# Altium PCB LightingDriver.PcbDoc (part 2 of 2)
Units mm, origin at the board's own origin, x right, y up, seen from the top; angles counter-clockwise.
Board outline 100 x 95 mm, 2 copper layers (Top Layer, Bottom Layer), stack 1.621 mm thick; 95 components, 49 nets, 284 pads, 147 vias.
Unrouted connection lines stored in the file: 4.
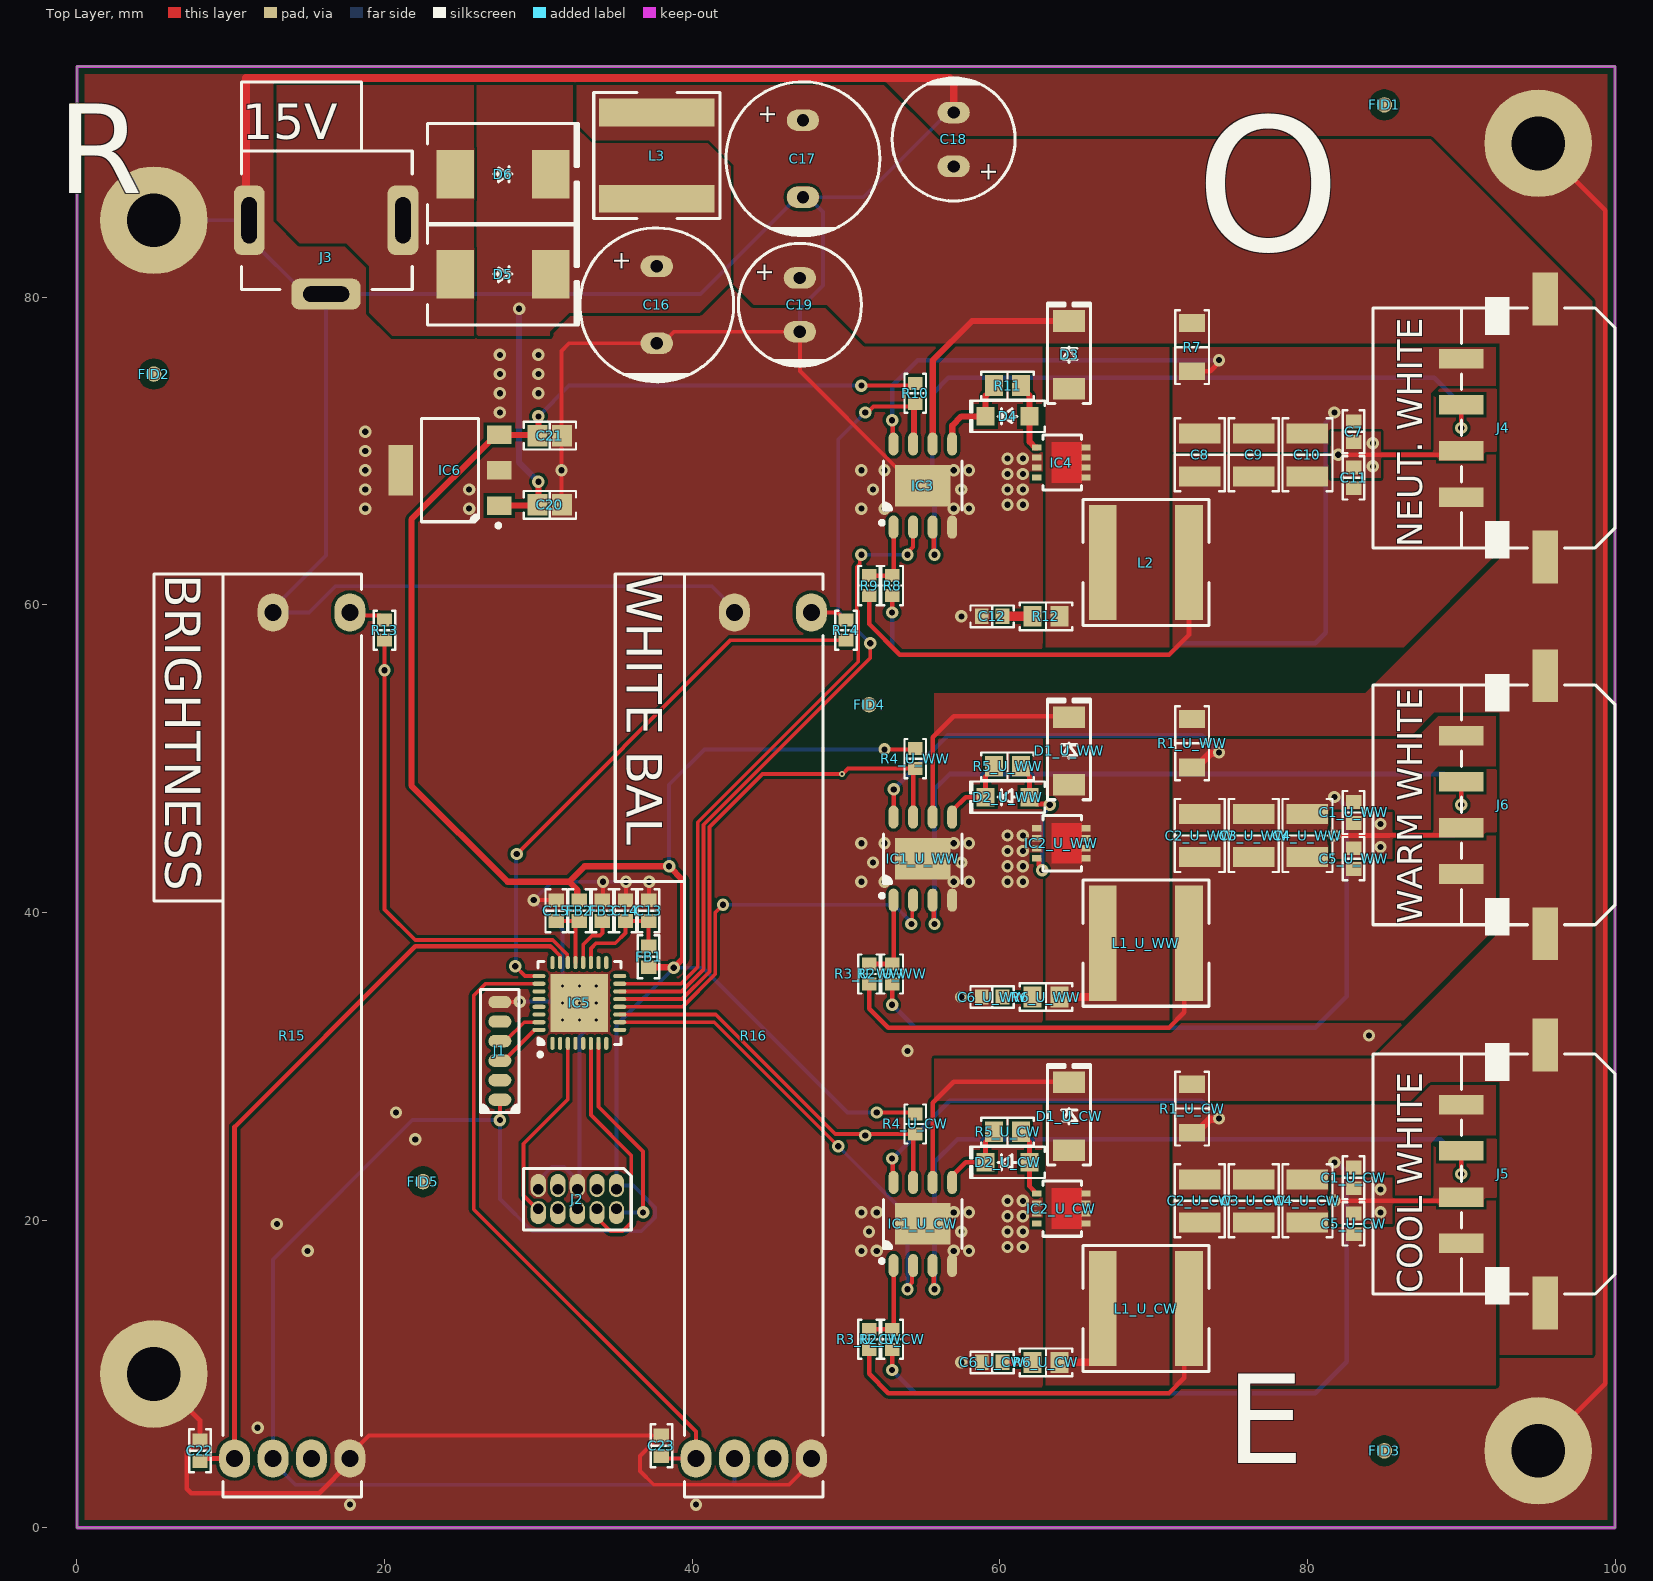
[diagram p0: Top Layer view]

## Via types
v1: diameter 0.8, hole 0.4, Top Layer to Bottom Layer, tented both sides, 137 vias
v2: diameter 0.5, hole 0.2, Top Layer to Bottom Layer, tented both sides, 9 vias
v3: diameter 0.4, hole 0.2, Top Layer to Bottom Layer, tented both sides, 1 vias

## Nets (pads, with @x,y where several pads share a name; then routed paths per layer and width w, separated by ;. In a path a pad name is that pad's centre, name@x,y a point inside that pad or via, vN(x,y) a via of type N, cw(c..) or ccw(c..) an arc to the next point about the centre after c; other vN are vias at no path point) (continued)
BRIGHTNESS: (continued)
  Bottom Layer w0.3: TP3.1 8.09,4.513 10.237,4.513 R15.2
BRIGHTNESS_LED: IC5.22 R13.2 TP4.1 | length 31.1
  Top Layer w0.25: R13.2 20,40.2 22,38.2 30.933,38.2 31.875,37.258 31.875,37.075 31.915,37.035 IC5.22
  other v1: 20,55.75
DIM: IC3.2 IC5.15 TP1.1 | length 41.8
  Top Layer w0.25: IC5.15 39.265,35.365 40.36,36.46 40.36,45.86 50.8,56.3 50.8,59.56 50.7,59.66 50.7,62.46 50.895,62.654 50.895,63.145 v1(51,63.25) ; v1(54,63.25) 54,63.399 54.365,63.764 IC3.2
  Bottom Layer w0.25: v1(51,63.25) v1(54,63.25)
DIM_U_CW: IC1_U_CW.2 IC5.10 TP5.1 | length 30.4
  Top Layer w0.25: IC5.10 41.435,32.865 v1(49.5,24.8) ; v1(54,15.5) 54,15.649 54.288,15.937 54.288,16.973 IC1_U_CW.2
  Bottom Layer w0.25: v1(49.5,24.8) 54,20.3 v1(54,15.5)
DIM_U_WW: IC1_U_WW.2 IC5.12 TP9.1 | length 26.2
  Top Layer w0.25: IC5.12 39.377,33.865 41.5,35.988 41.5,40 v1(42,40.5) ; v1(54.25,39.25) 54.307,39.307 54.307,40.743 IC1_U_WW.2
  Bottom Layer w0.25: v1(42,40.5) 53.1,40.5 54.25,39.35 v1(54.25,39.25)
DRV_HP: D4.2 IC3.5 R11.1 | length 5.8
  Top Layer w0.4: IC3.5 56.905,71.655 57.5,72.25 D4.2 59.07,73.595 59.625,74.15 R11.1
DRV_LP_U_CW: D2_U_CW.2 IC1_U_CW.5 R5_U_CW.1 | length 5.2
  Top Layer w0.3: IC1_U_CW.5 56.905,22.875 57.78,23.75 D2_U_CW.2 59.07,25.095 59.625,25.65 R5_U_CW.1
DRV_LP_U_WW: D2_U_WW.2 IC1_U_WW.5 R5_U_WW.1 | length 5.2
  Top Layer w0.3: IC1_U_WW.5 56.905,46.625 57.78,47.5 D2_U_WW.2 59.07,48.845 59.625,49.4 R5_U_WW.1
ERROR_CW: IC1_U_CW.7 IC5.11 R4_U_CW.1 TP8.1 | length 25.6
  Top Layer w0.25: IC5.11 41.535,33.365 49.3,25.6 R4_U_CW.1 R4_U_CW.1@54.365,25.465
  Top Layer w0.3: IC1_U_CW.7 R4_U_CW.1@54.365,25.465
  other v1: 51.25,25.5
ERROR_NW: IC3.7 IC5.14 R10.1 TP2.1 | length 54.4
  Top Layer w0.25: IC5.14 39.302,34.865 40.74,36.303 40.74,45.703 51.579,56.542 v1(51.579,57.5) ; v1(51.25,72.5) 51.399,72.5 51.78,72.881 54.281,72.881 54.413,73.013 R10.1
  Top Layer w0.4: IC3.7 54.413,70.498 R10.1@54.413,73.013
  Bottom Layer w0.25: v1(51.25,72.5) 49.5,70.75 49.5,59.579 v1(51.579,57.5)
ERROR_WW: IC1_U_WW.7 IC5.13 R4_U_WW.1 TP10.1 | length 34.1
  Top Layer w0.25: IC5.13 39.34,34.365 41.12,36.145 41.12,45.545 44.575,49 v3(49.75,49) 49.791,49 50.141,49.35 R4_U_WW.1
  Top Layer w0.3: IC1_U_WW.7 54.365,49.215 R4_U_WW.1
GATE_HP: D4.1 IC4.G R11.2 | length 4.5
  Top Layer w0.4: R11.2 61.375,74.15 61.93,73.595 D4.1 61.93,70.595 62.3,70.225 62.4,70.225
GATE_LP_U_CW: D2_U_CW.1 IC2_U_CW.G R5_U_CW.2 | length 4.5
  Top Layer w0.3: R5_U_CW.2 61.375,25.65 61.93,25.095 D2_U_CW.1 61.93,22.195 62.25,21.875 62.25,21.775 62.3,21.725 62.4,21.725
GATE_LP_U_WW: D2_U_WW.1 IC2_U_WW.G R5_U_WW.2 | length 9.2
  Top Layer w0.3: R5_U_WW.2 61.375,49.4 61.93,48.845 D2_U_WW.1 62.38,47.05 63.2,47.05 v1(63.25,47) ; IC2_U_WW.G 62.5,43.525 62.55,43.475 62.55,43.085 62.75,42.885 v1(62.75,42.75)
  Bottom Layer w0.3: v1(62.75,42.75) 62.75,46.365 63.25,46.865 v1(63.25,47)
GND: C1_U_CW.1 C1_U_WW.1 C5_U_CW.1 C5_U_WW.1 C6_U_CW.1 C6_U_WW.1 C7.1 C11.1 C12.1 C13.1 C14.1 C15.1 C16.2 C17.2 C18.2 C19.2 C20.1 C21.1 C22.1 C23.1 FB3.1 IC1_U_CW.4 IC1_U_CW.9 IC1_U_WW.4 IC1_U_WW.9 IC2_U_CW.S IC2_U_WW.S IC3.4 IC3.9 IC4.S IC5.33 IC6.2 IC6.4 J1.6 J2.5 J2.9 J3.2 J3.3 J4.3 J5.3 J6.3 pad.M1 pad.M2 pad.M3 pad.M4 R15.3 R15.E R16.3 R16.E | length 430.4
  Top Layer w0.25: R15.E 17.75,4.75 19,6 C23.1@37.95,6 ; J1.6 27.513,34.188 28.788,34.188 v1(28.8,34.2) ; v1(29.7,40.8) 31.155,40.8 C15.1 ; C20.1@31.5,66.5 31.5,76.5 32,77 C16.2 38.07,77 38.82,77.75 C19.2 47,75.201 53.226,68.975 53.775,68.975 IC3.9 ; FB3.1 34.2,40.825 v1(34.2,42) ; C14.1 35.7,40.825 v1(35.7,42) ; C13.1 37.2,40.825 v1(37.2,42) ; C23.1 C23.1@37.95,6 ; R16.E 47.75,4.25 46.295,2.795 37.505,2.795 36.604,3.696 36.604,4.663 37.365,5.425 37.375,5.425 C23.1@37.95,6
  Top Layer w0.3: pad.M1 8,7 C22.1 7.95,5.675 7.407,5.132 7.362,5.132 7.15,4.92 7.15,2.526 7.426,2.25 15.75,2.25 17.75,4.25 R15.E ; v1(81.75,21.25) 89.75,21.25 J5.3 ; v1(81.75,45) 85.328,45 85.343,45.015 89.515,45.015 J6.3 ; v1(82,69.75) 89.75,69.75 J4.3 ; pad.M4 99.35,9.35 99.35,85.65 pad.M3
  Top Layer w0.5: J3.2 11,85 11,94.25 56.707,94.25 57,93.957 C18.2
  Bottom Layer w0.25: pad.M2 J3.2 11.2,83.85 14.85,80.2 J3.3 ; v1(28.8,34.2) 31.412,34.2 31.497,34.115 v2(31.565,34.115) ; J2.9 30,22.581 30.874,23.455 31.666,23.455 32.54,22.581 J2.5 32.679,22.139 32.679,31.929 v2(33.765,33.015) ; v2(31.565,35.215) 31.565,38.935 v1(29.7,40.8) 30.9,42 v1(34.2,42) v1(35.7,42) v1(37.2,42) ; R16.3 42.75,59.75 41.295,61.205 16.808,61.205 15.103,59.5 R15.3 12.75,59.75 16.2,63.2 J3.3 ; C19.2 47,79.252 48.505,80.757 48.505,85.545 C17.2@47.55,86.5 ; C18.2 56.65,92 51.15,86.5 C17.2@47.55,86.5 ; J3.3 40.55,80.2 46.85,86.5 C17.2 C17.2@47.55,86.5
  other v1: 17.75,1.5 40.25,1.5 11.75,6.5 57.5,10.75 15,18 51,18 52,18 57,18 58,18 60.5,18.25 61.5,18.25 51.5,19.25 57.5,19.25 60.5,19.25 61.5,19.25 13,19.75 60.5,20.25 61.5,20.25 51,20.5 52,20.5 57,20.5 58,20.5 84.75,20.5 60.5,21.25 61.5,21.25 84.75,22 22,25.25 20.75,27 54,31 84,32 57.5,34.5 51,42 52.5,42 57,42 58,42 60.5,42 61.5,42 60.5,43 61.5,43 51.75,43.25 57.5,43.25 60.5,44 61.5,44 84.75,44.25 51,44.5 52.5,44.5 57,44.5 58,44.5 60.5,45 61.5,45 84.75,45.75 57.5,59.25 18.75,66.25 25.5,66.25 51,66.25 52.5,66.25 57,66.25 58,66.25 60.5,66.5 61.5,66.5 18.75,67.5 25.5,67.5 51.75,67.5 57.5,67.5 60.5,67.5 61.5,67.5 60.5,68.5 61.5,68.5 18.75,68.75 31.5,68.75 51,68.75 52.5,68.75 57,68.75 58,68.75 84.25,69 60.5,69.5 61.5,69.5 18.75,70 84.25,70.5 18.75,71.25 27.5,72.5 27.5,73.75 30,73.75 27.5,75 30,75 27.5,76.25 30,76.25
  other v2: 31.565,33.015 32.665,33.015 32.665,34.115 33.765,34.115 32.665,35.215 33.765,35.215
LED_N: C8.1 C9.1 C10.1 C11.2 J4.4 L2.2 R9.1 | length 28.7
  Top Layer w0.3: R9.1 51.5,58.75 53.5,56.75 71,56.75 72.3,58.05 L2.2
LED_P: C7.2 C8.2 C9.2 C10.2 IC3.8 J4.1 R7.1 R8.2 | length 74.8
  Top Layer w0.3: v1(53,59.5) R8.2 ; v1(53,72) 53.047,71.953 53.047,70.498 IC3.8 ; R7.1 73.675,75.175 73.8,75.3 73.8,75.319 74.25,75.769 v1(74.25,75.904)
  Bottom Layer w0.3: v1(53,59.5) 53,57.25 53.5,56.75 71,56.75 71.75,57.5 80.5,57.5 81.196,58.196 81.196,71.852 81.75,72.406 v1(81.75,72.5) ; v1(53,72) 53,74.25 54.654,75.904 v1(74.25,75.904)
LED_U_CW_N: C2_U_CW.1 C3_U_CW.1 C4_U_CW.1 C5_U_CW.2 J5.4 L1_U_CW.2 R3_U_CW.1 | length 27.7
  Top Layer w0.3: R3_U_CW.1 51.5,10 52.75,8.75 71,8.75 72,9.75 72,13.95 L1_U_CW.2
LED_U_CW_P: C1_U_CW.2 C2_U_CW.2 C3_U_CW.2 C4_U_CW.2 IC1_U_CW.8 J5.1 R1_U_CW.1 R2_U_CW.2 | length 72.8
  Top Layer w0.3: v1(53,10.25) R2_U_CW.2 ; v1(53,24) 53.047,23.953 53.047,22.497 IC1_U_CW.8
  Top Layer w0.5: R1_U_CW.1 72.775,25.675 73.647,26.547 74.193,26.547 v1(74.25,26.604)
  Bottom Layer w0.3: v1(53,10.25) 54.5,8.75 80.5,8.75 82.554,10.804 82.554,23.14 82.342,23.352 82.283,23.352 81.885,23.75 v1(81.75,23.75) ; v1(53,24) 56.75,27.75 73.104,27.75 v1(74.25,26.604)
LED_U_WW_N: C2_U_WW.1 C3_U_WW.1 C4_U_WW.1 C5_U_WW.2 J6.4 L1_U_WW.2 R3_U_WW.1 | length 27.7
  Top Layer w0.3: R3_U_WW.1 51.5,33.75 52.75,32.5 71,32.5 72,33.5 72,37.7 L1_U_WW.2
LED_U_WW_P: C1_U_WW.2 C2_U_WW.2 C3_U_WW.2 C4_U_WW.2 IC1_U_WW.8 J6.1 R1_U_WW.1 R2_U_WW.2 | length 72.8
  Top Layer w0.3: v1(53,34) R2_U_WW.2 ; IC1_U_WW.8 53.097,46.203 53.097,47.997 v1(53.1,48)
  Top Layer w0.5: R1_U_WW.1 72.775,49.425 73.697,50.347 74.193,50.347 v1(74.25,50.404)
  Bottom Layer w0.3: v1(53,34) 54.5,32.5 80.5,32.5 82.554,34.554 82.554,46.89 82.342,47.102 82.283,47.102 81.885,47.5 v1(81.75,47.5) ; v1(53.1,48) 56.6,51.5 73.154,51.5 v1(74.25,50.404)
NetR13_1: R13.1 R15.B | length 2.5
  Top Layer w0.25: R15.B 17.95,59.3 19.7,59.3 R13.1
NetR14_1: R14.1 R16.B | length 2.5
  Top Layer w0.25: R16.B 49.45,59.5 49.95,59 R14.1
NTC: IC3.3 J4.2 | length 50.9
  Top Layer w0.3: IC3.3 55.692,64.993 55.692,63.308 v1(55.75,63.25) ; v1(90,71.5) J4.2
  Bottom Layer w0.3: v1(55.75,63.25) 55.75,68.468 55.6,68.618 55.6,73.7 56.65,74.75 88.25,74.75 90,73 v1(90,71.5)
NTC_U_CW: IC1_U_CW.3 J5.2 | length 47.7
  Top Layer w0.3: IC1_U_CW.3 55.692,16.993 55.692,15.558 v1(55.75,15.5) ; v1(90,23) J5.2
  Bottom Layer w0.3: v1(55.75,15.5) 55.75,23.75 57.25,25.25 88.65,25.25 90,23.9 v1(90,23)
NTC_U_WW: IC1_U_WW.3 J6.2 | length 47.9
  Top Layer w0.3: IC1_U_WW.3 55.692,40.743 55.692,39.308 v1(55.75,39.25) ; v1(90,47) J6.2
  Bottom Layer w0.3: v1(55.75,39.25) 55.75,48 56.75,49 88.9,49 90,47.9 v1(90,47)
OSP_HP: IC3.1 R8.1 R9.2 | length 4.7
  Top Layer w0.3: R9.2 R8.1 53.095,61.995 IC3.1
OSP_LP_U_CW: IC1_U_CW.1 R2_U_CW.1 R3_U_CW.2 | length 5.7
  Top Layer w0.3: R3_U_CW.2 R2_U_CW.1 53.095,12.995 IC1_U_CW.1
OSP_LP_U_WW: IC1_U_WW.1 R2_U_WW.1 R3_U_WW.2 | length 5.7
  Top Layer w0.3: R3_U_WW.2 R2_U_WW.1 53.095,36.745 IC1_U_WW.1
RESET: IC5.3 J2.10 | length 12.4
  Top Layer w0.25: J2.10 29.919,20.73 29.045,21.604 29.045,24.963 31.915,27.833 IC5.3
SNUB_HP: C12.2 R12.1 | length 2
  Top Layer w0.6: C12.2 R12.1
SNUB_LP_U_CW: C6_U_CW.2 R6_U_CW.1 | length 1.9
  Top Layer w0.5: C6_U_CW.2 R6_U_CW.1
SNUB_LP_U_WW: C6_U_WW.2 R6_U_WW.1 | length 1.9
  Top Layer w0.5: C6_U_WW.2 R6_U_WW.1
SW_HP: D3.1 IC4.D L2.1 R12.2
SW_LP_U_CW: D1_U_CW.1 IC2_U_CW.D L1_U_CW.1 R6_U_CW.2 | length 5.9
  Top Layer w0.5: R6_U_CW.2 66.05,10.75 66.7,11.4 L1_U_CW.1
SW_LP_U_WW: D1_U_WW.1 IC2_U_WW.D L1_U_WW.1 R6_U_WW.2 | length 5.9
  Top Layer w0.5: R6_U_WW.2 66.05,34.5 66.7,35.15 L1_U_WW.1
SWCLK: IC5.6 J2.4 | length 16.1
  Top Layer w0.25: IC5.6 33.415,26.823 36.035,24.203 36.035,19.834 35.476,19.275 34.684,19.275 33.81,20.149 J2.4
SWDIO: IC5.7 J2.2 | length 14
  Top Layer w0.25: IC5.7 33.915,27.369 36.814,24.47 v1(36.814,20.5)
  Bottom Layer w0.25: J2.2 35.31,20.5 v1(36.814,20.5)
UART_RX: IC5.31 J1.4 | length 3
  Top Layer w0.25: J1.4 27.85,31.635 29.08,32.865 IC5.31
UART_TX: IC5.32 J1.3 | length 3.4
  Top Layer w0.25: J1.3 27.755,30.365 29.755,32.365 IC5.32
VIN: C16.1 C20.2 D5.2 D6.2 IC6.1 L3.1 | length 15.8
  Top Layer w0.4: IC6.1 29.9,66.45 C20.2 30,66.55 v1(30,68)
  Bottom Layer w0.4: v1(28.75,79.25) 28.75,69.25 v1(30,68)
VJACK: D5.1 D6.1 J3.1
VREFN: FB3.2 IC5.20 | length 3.5
  Top Layer w0.25: IC5.20 32.915,37.915 33.5,38.5 34,38.5 34.165,38.665 FB3.2
VREFP: C15.2 FB2.2 IC5.21 | length 4.3
  Top Layer w0.25: C15.2 FB2.2 32.415,39.19 IC5.21
WHITEBAL: C23.2 IC5.26 R16.2 TP7.1 | length 45.2
  Top Layer w0.25: IC5.26 26.565,35.365 25.8,34.6 25.8,20.7 40.25,6.25 R16.2 38.15,4.5 C23.2
  Bottom Layer w0.25: TP7.1 R16.2
WHITEBAL_LED: IC5.25 R14.2 TP6.1 | length 36.3
  Top Layer w0.25: v1(28.5,36.5) 29.135,35.865 IC5.25 ; v1(28.6,43.8) 42.5,57.7 R14.2
  Bottom Layer w0.25: v1(28.5,36.5) 28.55,36.55 28.55,43.75 v1(28.6,43.8)
pads on no net: FID1.F FID2.F FID3.F FID4.F FID5.F IC5.1 IC5.2 IC5.4 IC5.5 IC5.8 IC5.9 IC5.16 IC5.17 IC5.18 IC5.24 IC5.27 IC5.28 IC5.29 IC5.30 J1.2 J1.5 J2.3 J2.6 J2.7 J2.8 R15.L R16.L

## Polygon pours and split planes (outlines as drawn)
GND on Top Layer "GND_L01_P047" (solid, remove dead copper, pour order 47): 0,0 0,95 100,95 100,0
LED_N on Top Layer "gnd" (solid, remove dead copper, pour order 25): 71.25,69.75 92.25,69.75 92.25,63.25 86.25,57.25 71.25,57.25
15V on Top Layer "gnd" (solid, remove dead copper, pour order 44): 55.75,51.5 86.75,51.5 88.25,53 93.25,53 93.25,63 92.5,63 83.75,54.25 55.75,54.25
LED_P on Top Layer "gnd" (solid, remove dead copper, pour order 26): 71.25,69.75 71.25,76.75 92.25,76.75 92.25,74.25 88.5,74.25 88,73.75 88,69.75
15V on Top Layer "15V_L01_P043" (solid, remove dead copper, pour order 43): 98.5,78.75 92.5,78.75 92.5,11.25 98.5,11.25
15V on Top Layer "15V_L01_P042" (solid, remove dead copper, pour order 42): 32.5,95 51.25,95 56,90.25 88,90.25 98.5,79.75 98.5,77 51.25,77 48.75,79.5 44,79.5 42.5,81 42.5,88.5 41,90 32.5,90
VJACK on Top Layer "VJACK_L01_P041" (solid, remove dead copper, pour order 41): 26,77.5 20.5,77.5 19,79 19,82 17.5,83.5 14.5,83.5 13,85 13,95 26,95
VIN on Top Layer "Top Layer-VIN" (solid, remove dead copper, pour order 40): 26,95 32.25,95 32.25,91.25 33.5,90 41,90 42.5,88.5 42.5,81 40.5,79 32,79 30.75,77.75 30.75,77.5 26,77.5
GND on Top Layer "gnd" (solid, remove dead copper, pour order 39): 50.5,45 57.5,45 57.5,46.75 63,46.75 63,33 56.25,33 56.25,41.25 50.5,41.25
LED_U_WW_P on Top Layer "gnd" (solid, remove dead copper, pour order 36): 71.25,45.25 71.25,51.25 87,51.25 88.5,52.75 92.25,52.75 92.25,49.5 88.5,49.5 88,49 88,45.25
LED_U_WW_N on Top Layer "gnd" (solid, remove dead copper, pour order 34): 86.25,33 71.25,33 71.25,45 92.25,45 92.25,39
SW_LP_U_WW on Top Layer "gnd" (solid, remove dead copper, pour order 32): 63,33 63,51.25 71,51.25 71,33
GND on Top Layer "gnd" (solid, remove dead copper, pour order 30): 81.5,46.5 85.5,46.5 85.5,43.5 81.5,43.5
GND on Top Layer "gnd" (solid, remove dead copper, pour order 29): 81.5,22.75 85.5,22.75 85.5,19.75 81.5,19.75
SW_LP_U_CW on Top Layer "gnd" (solid, remove dead copper, pour order 31): 63,9.25 63,27.5 71,27.5 71,9.25
LED_U_CW_N on Top Layer "gnd" (solid, remove dead copper, pour order 33): 71.25,9.25 71.25,21.25 92.25,21.25 92.25,9.25
LED_U_CW_P on Top Layer "gnd" (solid, remove dead copper, pour order 35): 71.25,21.5 71.25,27.5 86.75,27.5 88,28.75 92.25,28.75 92.25,25.5 88.5,25.5 88,25 88,21.5
15V on Top Layer "gnd" (solid, remove dead copper, pour order 37): 55.75,27.75 86.75,27.75 88,29 93.25,29 93.25,39 92.75,39 84.25,30.5 55.75,30.5
GND on Top Layer "gnd" (solid, remove dead copper, pour order 38): 50.5,21.25 57.5,21.25 57.5,23 63,23 63,9.25 56.25,9.25 56.25,17.5 50.5,17.5
15V on Top Layer "gnd" (solid, remove dead copper, pour order 28): 63,77 75.5,77 75.5,79.75 63,79.75
GND on Top Layer "gnd" (solid, remove dead copper, pour order 27): 50.5,69.5 57.5,69.5 57.5,71.25 63,71.25 63,57.5 56.25,57.5 56.25,65.75 50.5,65.75
SW_HP on Top Layer "NONET_L-01_P-001" (solid, remove dead copper, pour order 23): 63,57.25 63,64.75 63,76.75 71,76.75 71,57.25
GND on Top Layer "gnd" (solid, remove dead copper, pour order 24): 84.75,71.25 81.5,71.25 81.5,68.25 84.75,68.25
GND on Bottom Layer "GND_L02_P046" (solid, remove dead copper, pour order 46): 0,0 0,95 100,95 100,0

## Keep-outs
Keep-Out Layer:
  the board outline again, w0.2

## Silkscreen, mask and mechanical layers (free items; w line width, h text height)
Top Overlay:
  lines w0.2: 9.5,40.75 5,40.75 5,62 9.5,62 ; 10.7,89.5 10.7,94 18.5,94 18.5,89.5 ; 39.5,42 35,42 35,62 39.5,62 ; 90,15.2 84.25,15.2 84.25,30.8 90,30.8 ; 90,39.2 84.25,39.2 84.25,54.8 90,54.8 ; 90,63.7 84.25,63.7 84.25,79.3 90,79.3
  text "15V" at 10.75,89.497 h4
  text "R" at -1.272,84.832 h10
  text "O" at 72.732,80.153 h15
  text "NEUT. WHITE" at 88,63.75 h2.8 r90
  text "BRIGHTNESS" at 4.975,62 h4 r270
  text "WHITE BAL" at 34.976,62 h4 r270
  text "WARM WHITE" at 88,39.25 h2.8 r90
  text "COOL WHITE" at 88,15.25 h2.8 r90
  text "E" at 74.723,2.27 h10
Bottom Overlay:
  lines w0.5: 59.75,74.25 90,74.25 90,91.5 59.75,91.5 59.75,74.25
  text "drive3led" at 90,87 h5
  text "Altium Demo Project" at 90,83.315 h3
  text "D3LEDV1R0" at 90,77.5 h3
  text "Mark Harris" at 59.75,74.25 h3 r270
  text "March 2022" at 90,74.25 h3

## Text inside footprints (layer, text, board x,y; h text height)
C16: Top Overlay "+" at 36.3,81.7 h2 r90
C17: Top Overlay "+" at 45.8,91.2 h2 r90
C18: Top Overlay "+" at 58.4,88.8 h2 r270
C19: Top Overlay "+" at 45.6,80.95 h2 r90